# EAGLE board _X6 (EAGLE 8.4.0)
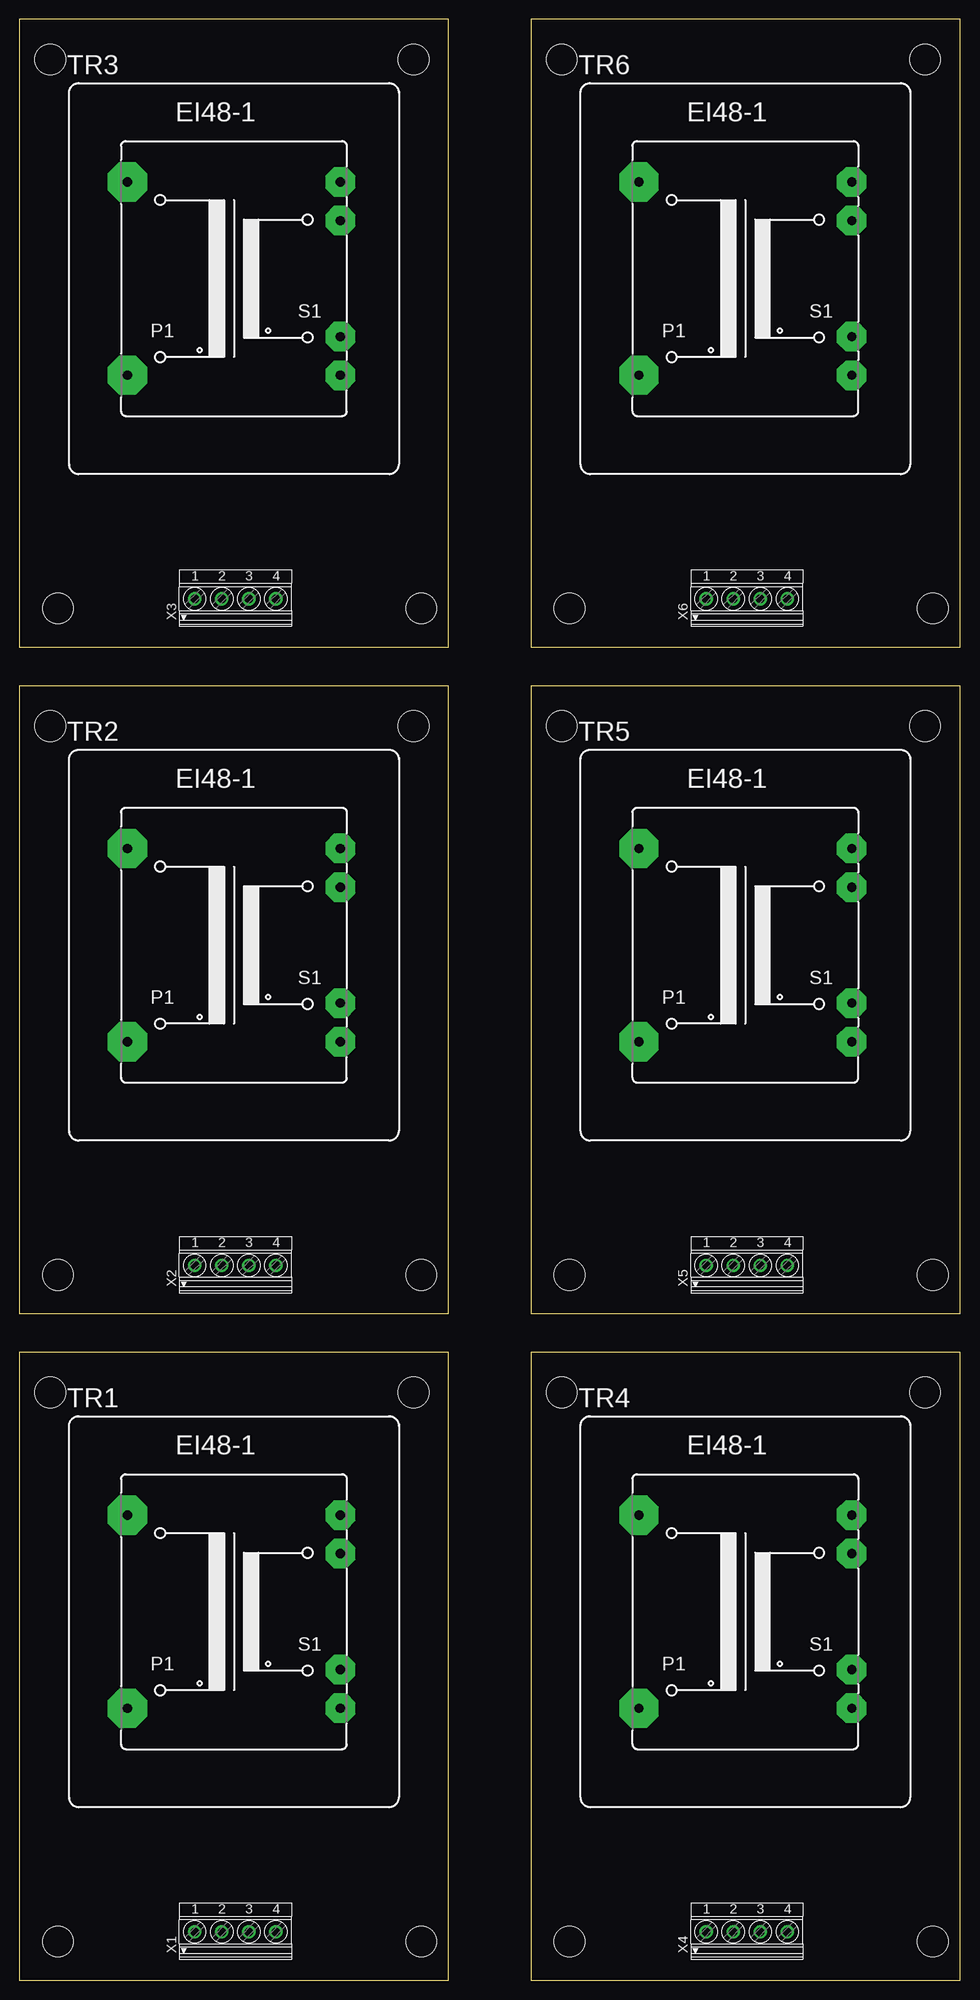
[diagram p0: board, top side]
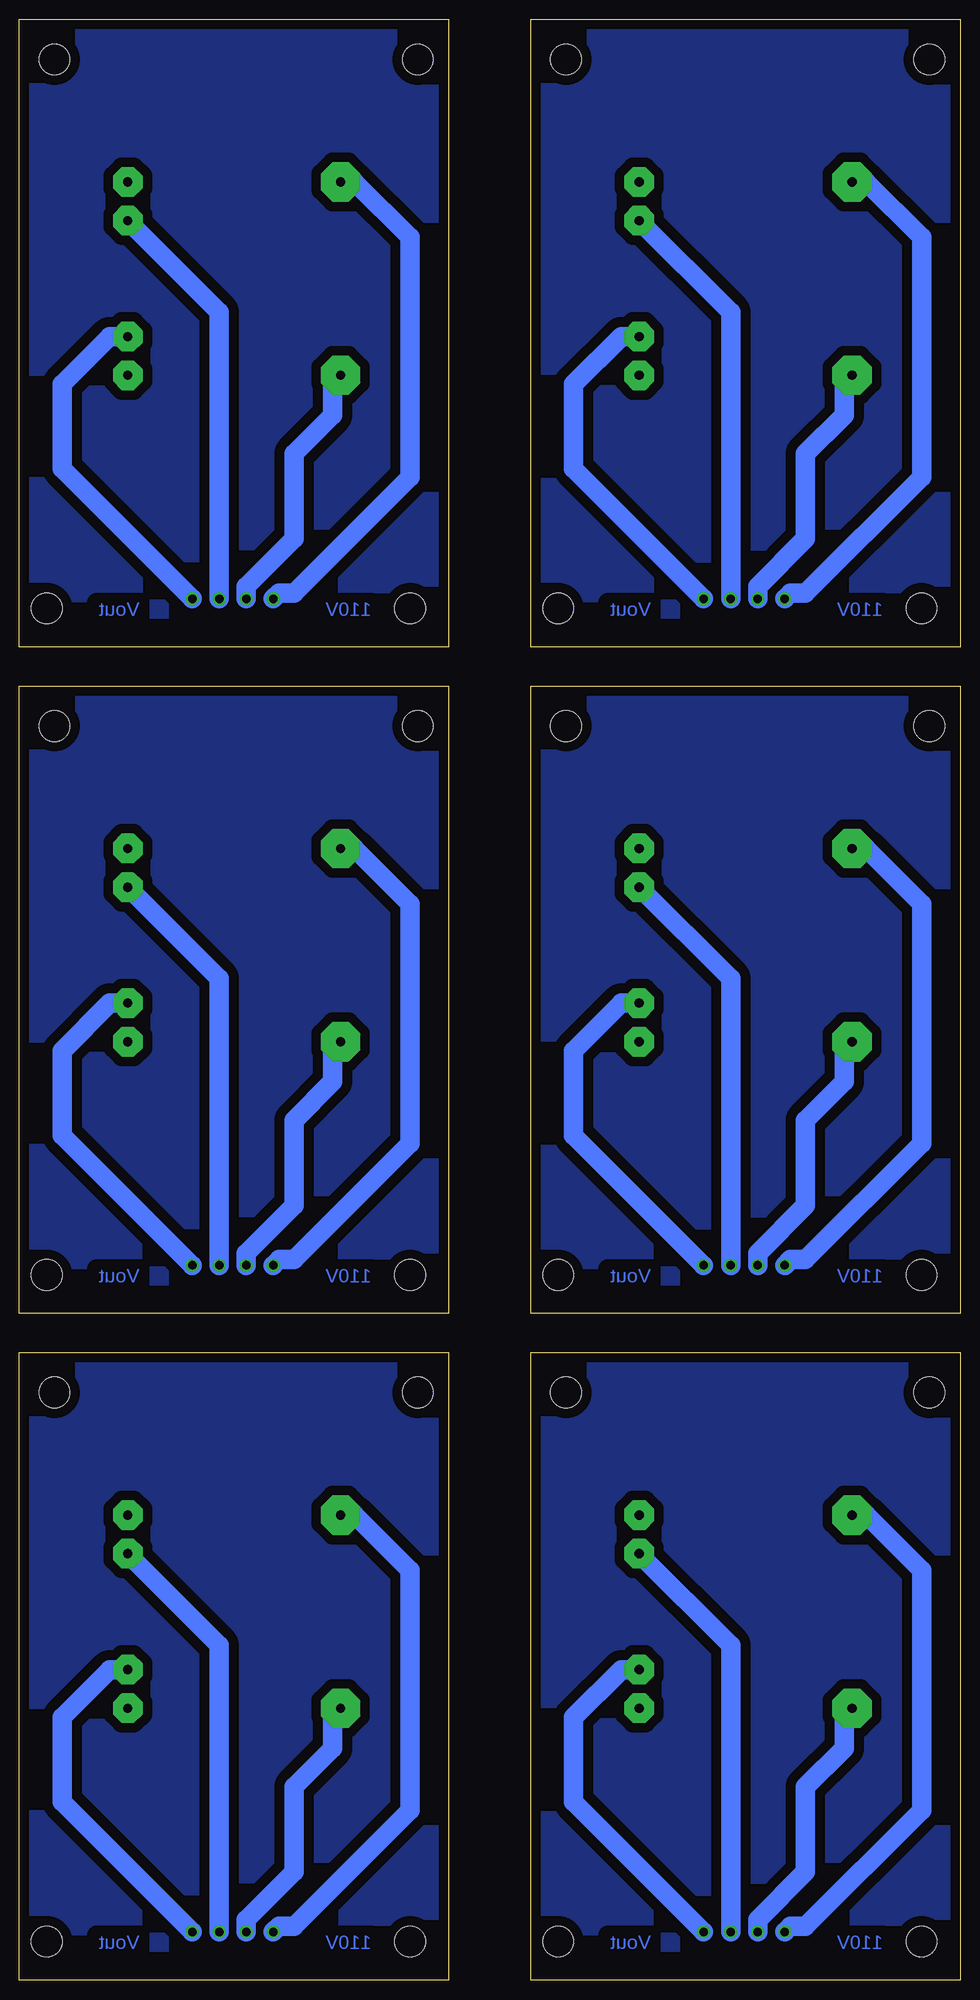
[diagram p1: board, bottom side, seen from below]

Size 121.71 x 253.59 mm. Coordinates in mm from the lower left corner, seen from the top.
Outline: 0,0 55.55,0 55.55,81.19 0,81.19 0,0
Outline: 0,86.2 55.55,86.2 55.55,167.39 0,167.39 0,86.2
Outline: 0,172.4 55.55,172.4 55.55,253.59 0,253.59 0,172.4
Outline: 66.16,0 121.71,0 121.71,81.19 66.16,81.19 66.16,0
Outline: 66.16,86.2 121.71,86.2 121.71,167.39 66.16,167.39 66.16,86.2
Outline: 66.16,172.4 121.71,172.4 121.71,253.59 66.16,253.59 66.16,172.4
Copper layers (1*16): Top 0.035mm / dielectric 1.5mm / Bottom 0.035mm
Design rules "default": minimum track width 6mil, minimum drill 0.35mm, track to track 6mil, track to pad 6mil, pad to pad 6mil, via to via 6mil, smd to smd 6mil, copper to edge 40mil, drill to drill 6mil, minimum pad ring 10mil, minimum via ring 8mil, stop-mask expansion 4mil, vias tented up to drill 0mil, thermal gap 10mil
Holes 4 mm at 5,5 52,5 4,76 51,76 5,91.2 52,91.2 4,162.2 51,162.2 5,177.4 52,177.4 4,248.4 51,248.4 71.16,5 118.16,5 70.16,76 117.16,76 71.16,91.2 118.16,91.2 70.16,162.2 117.16,162.2 71.16,177.4 118.16,177.4 70.16,248.4 117.16,248.4

## Footprints (pad centres in the part's own frame; a part is rotated, then mirrored left to right if it is on the bottom)
EI48-1 = drill 1.194 pad 5.08 octagon: 1 -13.767,12.497; 6 -13.767,-12.497 | drill 1.194 pad 3.81 octagon: 7 13.767,-12.497; 8 13.767,-7.493; 11 13.767,7.493; 12 13.767,12.497
1751264 = drill 1.1 pad 1.7: 1 -5.25,-0.1; 2 -1.75,-0.1; 3 1.75,-0.1; 4 5.25,-0.1

## Placement (x,y rotation side)
TR1  [EI48-1]  27.76,47.66 0 top
TR2  [EI48-1]  27.76,133.86 0 top
TR3  [EI48-1]  27.76,220.06 0 top
TR4  [EI48-1]  93.92,47.66 0 top
TR5  [EI48-1]  93.92,133.86 0 top
TR6  [EI48-1]  93.92,220.06 0 top
X1  1751264  [1751264]  27.94,6.35 0 top
X2  1751264  [1751264]  27.94,92.55 0 top
X3  1751264  [1751264]  27.94,178.75 0 top
X4  1751264  [1751264]  94.1,6.35 0 top
X5  1751264  [1751264]  94.1,92.55 0 top
X6  1751264  [1751264]  94.1,178.75 0 top

## Library data of the parts
TR1-TR6 = trafo
X1-X6 = con-phoenix-350; MPN: 1751264; OC_FARNELL: unknown; OC_NEWARK: 10R0934

## Nets
N$1: TR1.1 X1.1
N$2: TR1.6 X1.2
N$3: TR1.8 X1.4
N$4: TR1.11 X1.3
N$6: TR2.1 X2.1
N$7: TR2.6 X2.2
N$8: TR2.8 X2.4
N$9: TR2.11 X2.3
N$11: TR3.1 X3.1
N$12: TR3.6 X3.2
N$13: TR3.8 X3.4
N$14: TR3.11 X3.3
N$16: TR4.1 X4.1
N$17: TR4.6 X4.2
N$18: TR4.8 X4.4
N$19: TR4.11 X4.3
N$21: TR5.1 X5.1
N$22: TR5.6 X5.2
N$23: TR5.8 X5.4
N$24: TR5.11 X5.3
N$26: TR6.1 X6.1
N$27: TR6.6 X6.2
N$28: TR6.8 X6.4
N$29: TR6.11 X6.3

## Tracks (layer width: path | path; a pad name or v marks a point on that pad's centre or on a via)
N$1
  Bottom 2.54: TR1.1 12.16,60.16 5,53 5,22 20,7 21.94,7 X1.1
N$2
  Bottom 2.54: X1.2 26.19,7.81 20,14 20,25 15,30 15,34.16 TR1.6
N$3
  Bottom 2.54: TR1.8 43.83,40.17 50,34 50,23.06 X1.4
N$4
  Bottom 2.54: X1.3 29.69,43.32 TR1.11
N$5
  pour Bottom (isolate 1.27, rank 2): 0.15,4.9 55.15,4.9 56,81 0,81
N$6
  Bottom 2.54: TR2.1 12.16,146.36 5,139.2 5,108.2 20,93.2 21.94,93.2 X2.1
N$7
  Bottom 2.54: X2.2 26.19,94.01 20,100.2 20,111.2 15,116.2 15,120.36 TR2.6
N$8
  Bottom 2.54: TR2.8 43.83,126.37 50,120.2 50,109.26 X2.4
N$9
  Bottom 2.54: X2.3 29.69,129.52 TR2.11
N$10
  pour Bottom (isolate 1.27, rank 2): 0.15,91.1 55.15,91.1 56,167.2 0,167.2
N$11
  Bottom 2.54: TR3.1 12.16,232.56 5,225.4 5,194.4 20,179.4 21.94,179.4 X3.1
N$12
  Bottom 2.54: X3.2 26.19,180.21 20,186.4 20,197.4 15,202.4 15,206.56 TR3.6
N$13
  Bottom 2.54: TR3.8 43.83,212.57 50,206.4 50,195.46 X3.4
N$14
  Bottom 2.54: X3.3 29.69,215.72 TR3.11
N$15
  pour Bottom (isolate 1.27, rank 2): 0.15,177.3 55.15,177.3 56,253.4 0,253.4
N$16
  Bottom 2.54: TR4.1 78.32,60.16 71.16,53 71.16,22 86.16,7 88.1,7 X4.1
N$17
  Bottom 2.54: X4.2 92.35,7.81 86.16,14 86.16,25 81.16,30 81.16,34.16 TR4.6
N$18
  Bottom 2.54: TR4.8 109.99,40.17 116.16,34 116.16,23.06 X4.4
N$19
  Bottom 2.54: X4.3 95.85,43.32 TR4.11
N$20
  pour Bottom (isolate 1.27, rank 2): 66.31,4.9 121.31,4.9 122.16,81 66.16,81
N$21
  Bottom 2.54: TR5.1 78.32,146.36 71.16,139.2 71.16,108.2 86.16,93.2 88.1,93.2 X5.1
N$22
  Bottom 2.54: X5.2 92.35,94.01 86.16,100.2 86.16,111.2 81.16,116.2 81.16,120.36 TR5.6
N$23
  Bottom 2.54: TR5.8 109.99,126.37 116.16,120.2 116.16,109.26 X5.4
N$24
  Bottom 2.54: X5.3 95.85,129.52 TR5.11
N$25
  pour Bottom (isolate 1.27, rank 2): 66.31,91.1 121.31,91.1 122.16,167.2 66.16,167.2
N$26
  Bottom 2.54: TR6.1 78.32,232.56 71.16,225.4 71.16,194.4 86.16,179.4 88.1,179.4 X6.1
N$27
  Bottom 2.54: X6.2 92.35,180.21 86.16,186.4 86.16,197.4 81.16,202.4 81.16,206.56 TR6.6
N$28
  Bottom 2.54: TR6.8 109.99,212.57 116.16,206.4 116.16,195.46 X6.4
N$29
  Bottom 2.54: X6.3 95.85,215.72 TR6.11
N$30
  pour Bottom (isolate 1.27, rank 2): 66.31,177.3 121.31,177.3 122.16,253.4 66.16,253.4

## Text on the board
Bottom: 110V | Vout | 110V | Vout | 110V | Vout | 110V | Vout | 110V | Vout | 110V | Vout
_tnames: TR1 | TR1 | X1 | X1 | TR1 | TR1 | X1 | X1 | TR1 | TR1 | X1 | X1